# EAGLE board miniprojectlevel1 (EAGLE 7.2.0)

Size 100 x 80 mm. Coordinates in mm from the lower left corner, seen from the top.
Outline: 0,0 100,0 100,80 0,80 0,0
Copper layers (1*16): Top 0.035mm / dielectric 1.5mm / Bottom 0.035mm
Design rules "default": minimum track width 10mil, minimum drill 24mil, track to track 8mil, track to pad 8mil, pad to pad 8mil, via to via 8mil, smd to smd 8mil, copper to edge 40mil, drill to drill 8mil, minimum pad ring 10mil, minimum via ring 8mil, stop-mask expansion 4mil, vias tented up to drill 0mil, thermal gap 10mil

## Footprints (pad centres in the part's own frame; a part is rotated, then mirrored left to right if it is on the bottom)
DIL16 = drill 0.813 long: 1 -8.89,-3.81; 2 -6.35,-3.81; 3 -3.81,-3.81; 4 -1.27,-3.81; 5 1.27,-3.81; 6 3.81,-3.81; 7 6.35,-3.81; 8 8.89,-3.81; 9 8.89,3.81; 10 6.35,3.81; 11 3.81,3.81; 12 1.27,3.81; 13 -1.27,3.81; 14 -3.81,3.81; 15 -6.35,3.81; 16 -8.89,3.81
1X02 = drill 1.016 long: 1 -1.27,0; 2 1.27,0
DIL14 = drill 0.813 long: 1 -7.62,-3.81; 2 -5.08,-3.81; 3 -2.54,-3.81; 4 0,-3.81; 5 2.54,-3.81; 6 5.08,-3.81; 7 7.62,-3.81; 8 7.62,3.81; 9 5.08,3.81; 10 2.54,3.81; 11 0,3.81; 12 -2.54,3.81; 13 -5.08,3.81; 14 -7.62,3.81
1X04 = drill 1.016 long: 1 -3.81,0; 2 -1.27,0; 3 1.27,0; 4 3.81,0
1X03 = drill 1.016 long: 1 -2.54,0; 2 0,0; 3 2.54,0
JST-3-PTH-VERT = drill 0.7 pad 1.6: 1 -2,-0.55; 2 0,-0.55; 3 2,-0.55
1X07 = drill 1.016 long: 1 -7.62,0; 2 -5.08,0; 3 -2.54,0; 4 0,0; 5 2.54,0; 6 5.08,0; 7 7.62,0
0207/10 = drill 0.813 octagon: 1 -5.08,0; 2 5.08,0
EDG-04 = drill 0.813 long: 1 -3.81,-3.81; 2 -1.27,-3.81; 3 1.27,-3.81; 4 3.81,-3.81; 5 3.81,3.81; 6 1.27,3.81; 7 -1.27,3.81; 8 -3.81,3.81
1X08 = drill 1.016 long: 1 -8.89,0; 2 -6.35,0; 3 -3.81,0; 4 -1.27,0; 5 1.27,0; 6 3.81,0; 7 6.35,0; 8 8.89,0
ARDUINO_PRO_MINI = drill 1.016 pad 1.88: 1 -7.62,12.7; 2 -7.62,10.16; 3 -7.62,7.62; 4 -7.62,5.08; 5 -7.62,2.54; 6 -7.62,0; 7 -7.62,-2.54; 8 -7.62,-5.08; 9 -7.62,-7.62; 10 -7.62,-10.16; 11 -7.62,-12.7; 12 -7.62,-15.24; 13 7.62,-15.24; 14 7.62,-12.7; 15 7.62,-10.16; 16 7.62,-7.62; 17 7.62,-5.08; 18 7.62,-2.54; 19 7.62,0; 20 7.62,2.54; 21 7.62,5.08; 22 7.62,7.62; 23 7.62,10.16; 24 7.62,12.7; A4 4.763,1.429; A5 4.763,3.969; A6 4.763,-9.049; A7 4.763,-6.509; BLK -6.35,15.24; GND -3.81,15.24; GRN 6.35,15.24; RXI 1.27,15.24; TXO 3.81,15.24; VCC -1.27,15.24

## Placement (x,y rotation side)
ANAMUL_1  4051N  [DIL16]  -24.13,40.64 0 top  (outside the outline)
ANAMUL_2  4051N  [DIL16]  -46.99,40.64 0 top  (outside the outline)
ANAMUL_3  4051N  [DIL16]  -69.85,40.64 0 top  (outside the outline)
BEAGLEPOWER  [1X02]  -25.4,77.47 0 top  (outside the outline)
DIGMUL  74ACT151N  [DIL16]  -52.07,54.61 0 top  (outside the outline)
IC1  LM324N  [DIL14]  -73.66,54.61 0 top  (outside the outline)
JP1  [1X04]  -34.29,77.47 0 top  (outside the outline)
JP2  [1X04]  -45.72,77.47 0 top  (outside the outline)
JP3  [1X04]  -57.15,77.47 0 top  (outside the outline)
JP4  [1X02]  -58.42,83.82 0 top  (outside the outline)
JP5  [1X04]  -68.58,77.47 0 top  (outside the outline)
JP6  [1X04]  -80.01,77.47 0 top  (outside the outline)
JP7  [1X02]  -64.77,83.82 0 top  (outside the outline)
JP8  [1X03]  -26.67,83.82 0 top  (outside the outline)
JP9  [JST-3-PTH-VERT]  -17.78,64.77 0 top  (outside the outline)
JP10  [JST-3-PTH-VERT]  -26.67,64.77 0 top  (outside the outline)
JP11  [JST-3-PTH-VERT]  -35.56,64.77 0 top  (outside the outline)
JP12  [JST-3-PTH-VERT]  -44.45,64.77 0 top  (outside the outline)
M1  [1X02]  -71.12,83.82 0 top  (outside the outline)
M2  [1X02]  5.08,73.66 0 top
MD1  [1X07]  -22.86,71.12 0 top  (outside the outline)
MD2  [1X07]  -41.91,71.12 0 top  (outside the outline)
POWER  [1X02]  -36.83,83.82 0 top  (outside the outline)
R1  [0207/10]  -19.05,88.9 0 top  (outside the outline)
R2  [0207/10]  -31.75,88.9 0 top  (outside the outline)
R3  [0207/10]  -44.45,88.9 0 top  (outside the outline)
R4  [0207/10]  -57.15,88.9 0 top  (outside the outline)
RXTX1  [1X02]  -44.45,83.82 0 top  (outside the outline)
RXTX2  [1X02]  -52.07,83.82 0 top  (outside the outline)
SDASCL  [1X02]  -19.05,83.82 0 top  (outside the outline)
SW1  [EDG-04]  -20.32,54.61 0 top  (outside the outline)
SW2  [EDG-04]  -34.29,54.61 0 top  (outside the outline)
TCRT1  [1X07]  -60.96,71.12 0 top  (outside the outline)
TCRTEXTRA  [1X08]  -59.69,64.77 0 top  (outside the outline)
U$1  ARDUINO_PRO_MINI  [ARDUINO_PRO_MINI]  -29.21,17.78 0 top  (outside the outline)
U$4  ARDUINO_PRO_MINI  [ARDUINO_PRO_MINI]  -54.61,17.78 0 top  (outside the outline)

## Library data of the parts
ANAMUL_1-ANAMUL_3 = 40xx
BEAGLEPOWER JP1-JP8 M1 M2 MD1 MD2 POWER RXTX1 RXTX2 SDASCL TCRT1 TCRTEXTRA = pinhead
DIGMUL = 74xx-eu
IC1 = linear
JP9-JP12 = SparkFun-Connectors
R1-R4 = eagle-ltspice; SPICEMODEL: NONE; SPICEPREFIX: R
SW1 SW2 = special
U$1 U$4 = SparkFun-Boards

## Nets
GND: ANAMUL_1.8 ANAMUL_2.8 ANAMUL_3.8 DIGMUL.8
N$1: DIGMUL.5 U$4.6
N$2: ANAMUL_3.11
N$3: ANAMUL_1.1 TCRT1.5
N$4: ANAMUL_1.13 TCRT1.1
N$5: ANAMUL_1.14 TCRT1.2
N$6: ANAMUL_1.15 TCRT1.3
N$7: ANAMUL_1.12 TCRT1.4
N$8: ANAMUL_1.5 TCRT1.6
N$9: ANAMUL_1.2 TCRT1.7
N$10: DIGMUL.2 MD2.3
N$11: M2.1 U$4.11
N$12: DIGMUL.4 MD1.3
N$13: DIGMUL.3 MD1.5
N$14: DIGMUL.11
N$15: DIGMUL.10
N$16: DIGMUL.7 DIGMUL.9 JP2.1 JP3.1 JP5.1 JP6.1 JP9.2 JP10.2 JP11.2 JP12.2 MD1.1 MD2.1 R1.1 U$1.4 U$4.4
N$17: MD1.4 U$4.12
N$18: DIGMUL.1 MD2.5
N$19: MD1.2 U$4.14
N$20: MD1.6 U$4.15
N$21: MD2.2 U$4.9
N$22: MD2.6 U$4.8
N$23: MD2.4 U$4.13
N$24: ANAMUL_2.13 TCRTEXTRA.8
N$26: M1.1 U$4.5
N$27: M1.2 U$4.7
N$28: M2.2 U$4.10
N$29: ANAMUL_2.11 SW1.4
N$30: ANAMUL_2.10 U$4.20
N$31: SW1.3
N$32: ANAMUL_2.3 U$4.19
N$33: ANAMUL_3.13 JP1.3
N$34: ANAMUL_3.14 JP2.3
N$35: U$4.23
N$36: U$1.23
N$37: ANAMUL_3.15
N$38: R1.2 R4.1
N$39: ANAMUL_1.11 SW2.4
N$40: ANAMUL_1.10 U$1.20
N$41: ANAMUL_1.9 U$1.15
N$42: ANAMUL_1.3 U$1.A7
N$43: U$1.13
N$44: U$1.12
N$46: U$1.11
N$47: JP1.2 U$1.5
N$48: ANAMUL_3.3 U$1.14
N$49: JP2.2 U$1.6
N$50: JP3.2 U$1.7
N$51: JP5.2 U$1.8
N$52: JP6.2 U$1.9
N$53: ANAMUL_3.12 JP5.3
N$54: ANAMUL_3.1 JP6.3
N$55: MD1.7
N$56: R2.2 R3.1
N$57: ANAMUL_2.14
N$58: ANAMUL_2.15 TCRTEXTRA.6
N$59: IC1.7 R4.2 U$4.18
N$60: IC1.1 R3.2 U$4.17
N$61: ANAMUL_2.12 TCRTEXTRA.5
N$62: ANAMUL_2.1 TCRTEXTRA.4
N$63: ANAMUL_2.5 TCRTEXTRA.3
N$64: ANAMUL_2.2 TCRTEXTRA.2
N$65: ANAMUL_2.4 TCRTEXTRA.1
N$66: BEAGLEPOWER.1 SW1.1 SW2.1
N$67: U$4.1
N$68: U$4.2
N$69: U$1.1
N$70: RXTX2.2 U$1.2
N$71: BEAGLEPOWER.2 SW1.2 SW2.2
N$72: TCRTEXTRA.7
N$73: SW2.6 SW2.8 U$1.A5
N$74: SW2.5 SW2.7 U$1.A4
N$75: U$4.A4
N$76: SW1.6 U$4.A5
N$77: ANAMUL_3.10
N$78: ANAMUL_3.9
N$79: JP12.1 U$1.19
N$80: JP11.1 U$1.18
N$81: JP10.1 U$1.17
N$82: JP9.1 U$1.A6
N$84: ANAMUL_2.9
N$85: JP1.1
V+: IC1.4
V-: IC1.11
VCC: ANAMUL_1.16 ANAMUL_2.16 ANAMUL_3.16 DIGMUL.16 JP1.4 JP2.4 JP3.4 JP5.4 JP6.4 JP9.3 JP10.3 JP11.3 JP12.3 POWER.1 U$1.21 U$4.21
VEE: ANAMUL_1.7 ANAMUL_2.7 ANAMUL_3.7

## Tracks (layer width: path | path; a pad name or v marks a point on that pad's centre or on a via)
GND  (3 unrouted)
N$1  (1 unrouted)
N$3  (1 unrouted)
N$4  (1 unrouted)
N$5  (1 unrouted)
N$6  (1 unrouted)
N$7  (1 unrouted)
N$8  (1 unrouted)
N$9  (1 unrouted)
N$10  (1 unrouted)
N$11  (1 unrouted)
N$12  (1 unrouted)
N$13  (1 unrouted)
N$16  (14 unrouted)
N$17  (1 unrouted)
N$18  (1 unrouted)
N$19  (1 unrouted)
N$20  (1 unrouted)
N$21  (1 unrouted)
N$22  (1 unrouted)
N$23  (1 unrouted)
N$24  (1 unrouted)
N$26  (1 unrouted)
N$27  (1 unrouted)
N$28  (1 unrouted)
N$29  (1 unrouted)
N$30  (1 unrouted)
N$32  (1 unrouted)
N$33  (1 unrouted)
N$34  (1 unrouted)
N$38  (1 unrouted)
N$39  (1 unrouted)
N$40  (1 unrouted)
N$41  (1 unrouted)
N$42  (1 unrouted)
N$47  (1 unrouted)
N$48  (1 unrouted)
N$49  (1 unrouted)
N$50  (1 unrouted)
N$51  (1 unrouted)
N$52  (1 unrouted)
N$53  (1 unrouted)
N$54  (1 unrouted)
N$56  (1 unrouted)
N$58  (1 unrouted)
N$59  (2 unrouted)
N$60  (2 unrouted)
N$61  (1 unrouted)
N$62  (1 unrouted)
N$63  (1 unrouted)
N$64  (1 unrouted)
N$65  (1 unrouted)
N$66  (2 unrouted)
N$70  (1 unrouted)
N$71  (2 unrouted)
N$73  (2 unrouted)
N$74  (2 unrouted)
N$76  (1 unrouted)
N$79  (1 unrouted)
N$80  (1 unrouted)
N$81  (1 unrouted)
N$82  (1 unrouted)
VCC  (15 unrouted)
VEE  (2 unrouted)